# Altium PCB hri_hand_v2_1.PcbDoc
Units mm, origin at the board's own origin, x right, y up, seen from the top; angles counter-clockwise.
Board outline 38.53 x 73.99 mm, 4 copper layers (Top Layer, Mid-Layer 1, Mid-Layer 2, Bottom Layer), stack 0.905 mm thick; 38 components, 26 nets, 122 pads, 152 vias.
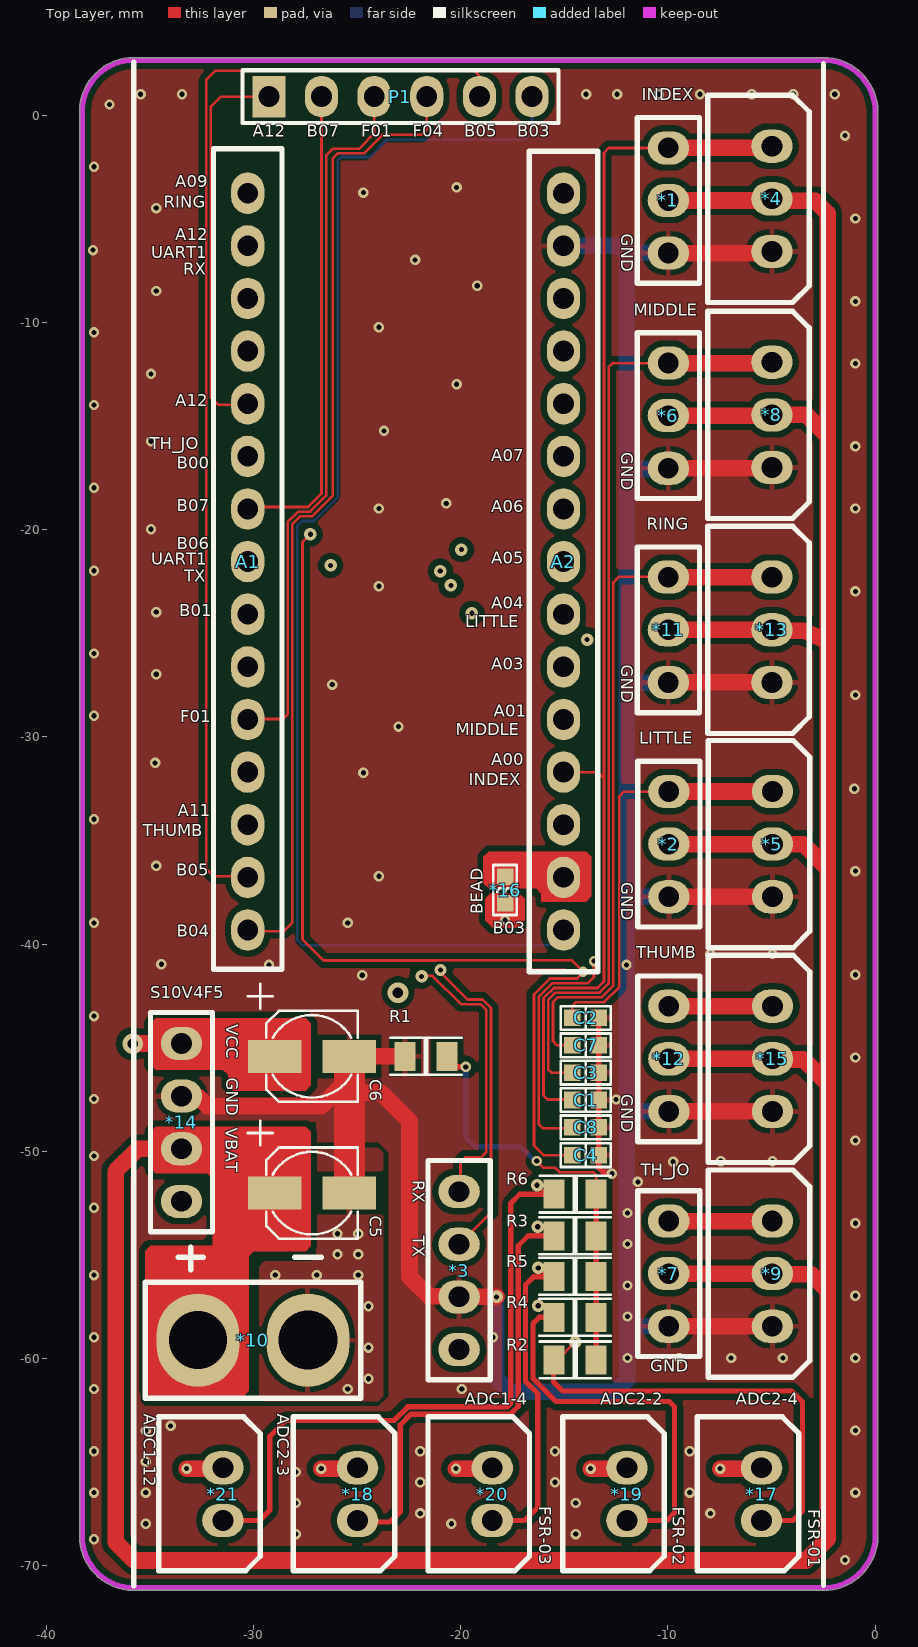
[diagram p0: Top Layer view]
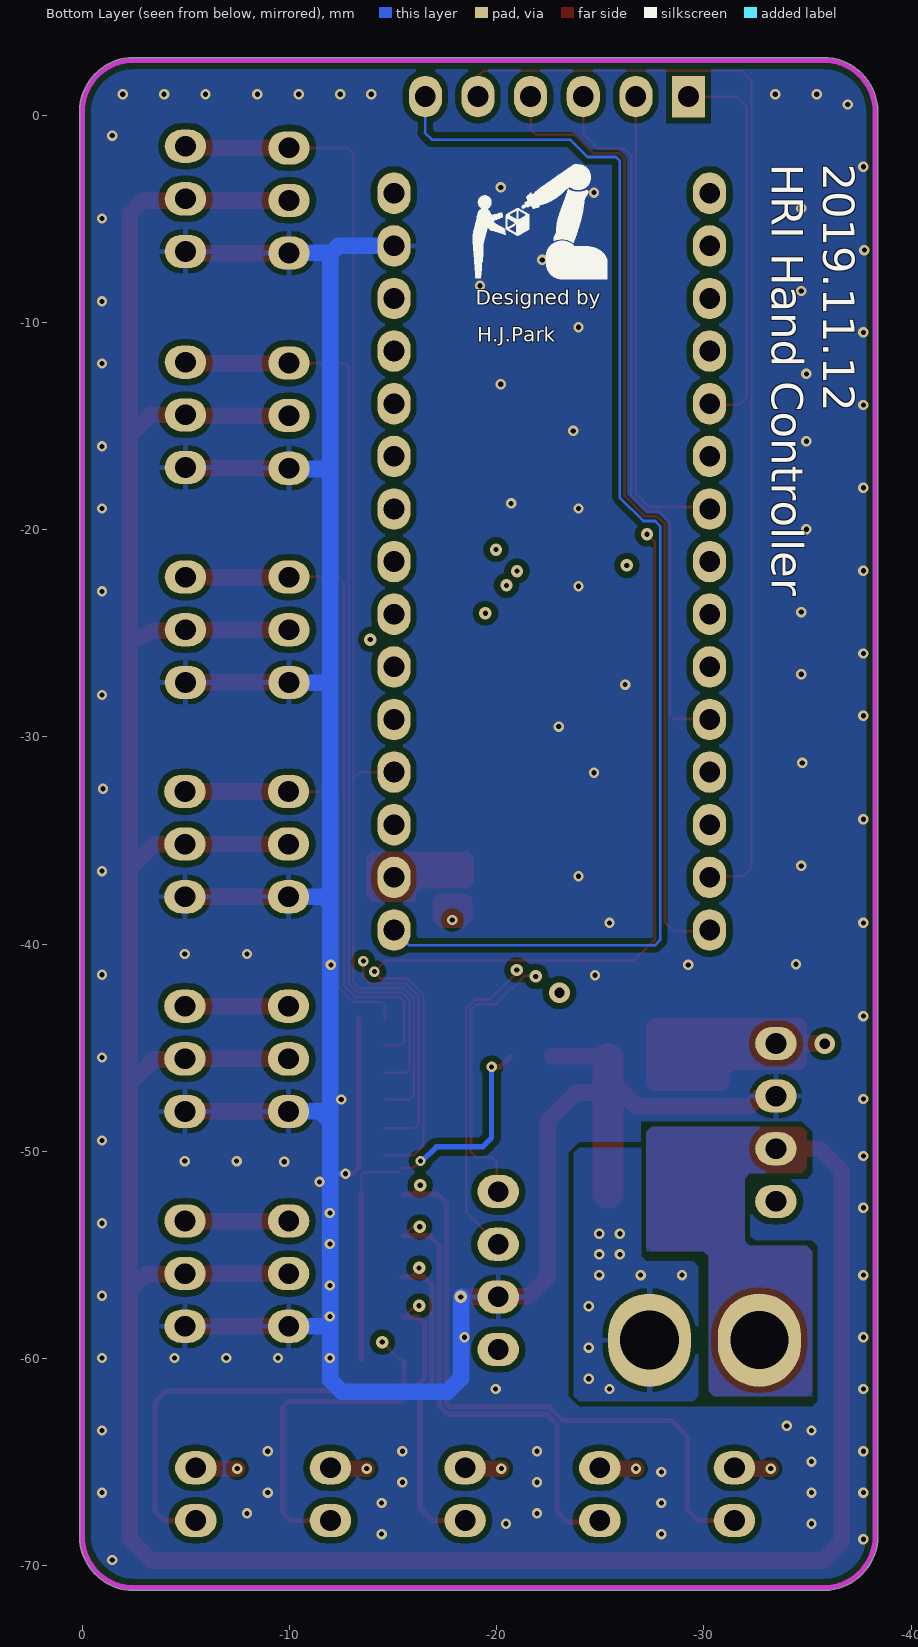
[diagram p1: Bottom Layer view, seen from below]
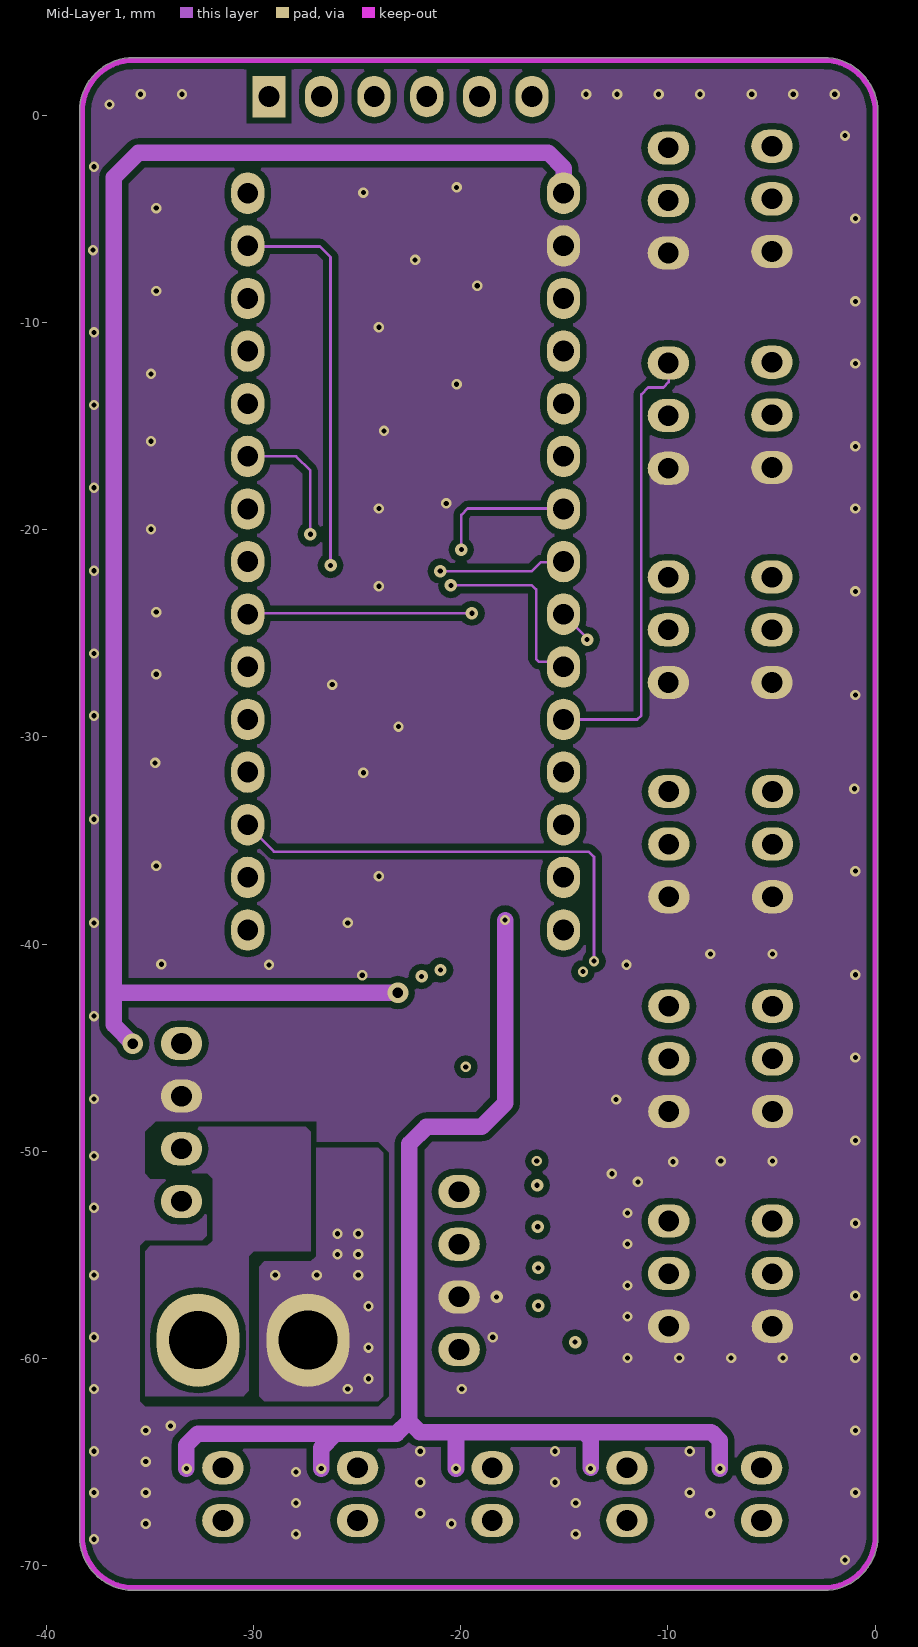
[diagram p2: Mid-Layer 1]
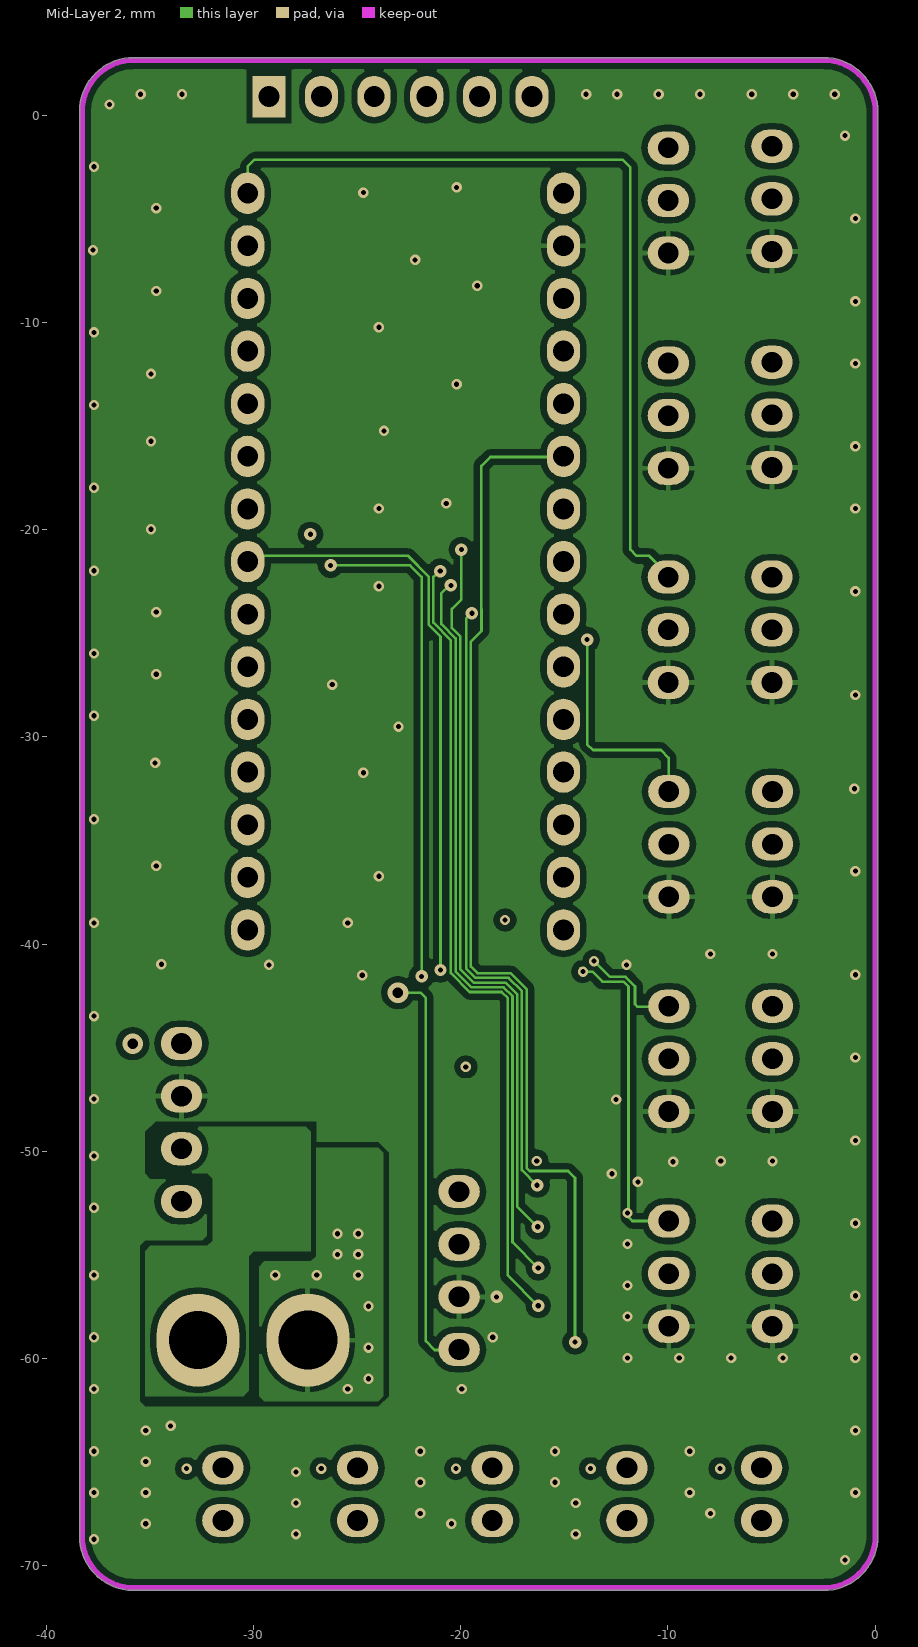
[diagram p3: Mid-Layer 2]
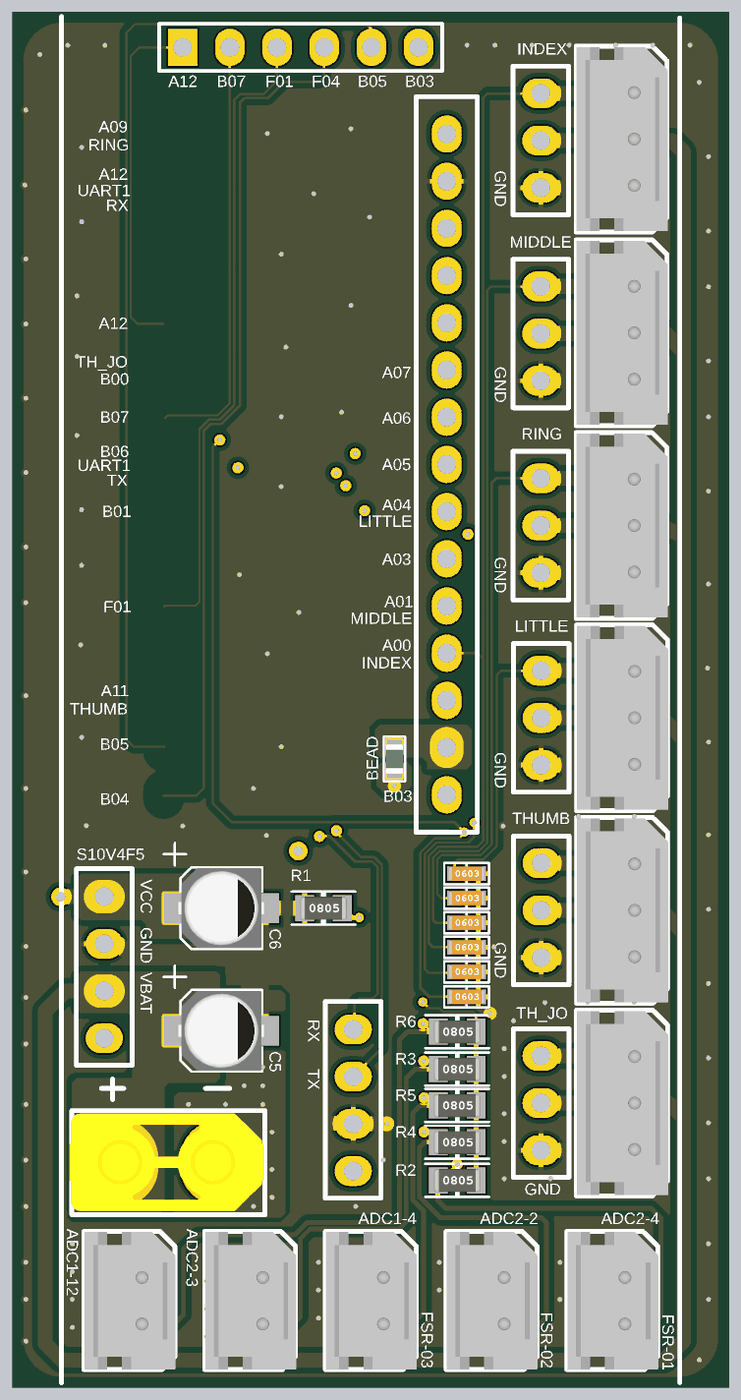
[diagram p4: 3D render of the assembled board from above, using the file's embedded part models]

## Layer stack, top to bottom
Top Solder: solder mask 0.0102, Solder Resist, Dk 3.5
Top Layer: signal copper 0.0356
Dielectric 1: dielectric 0.254, FR-4, Dk 4.8
Mid-Layer 1: signal copper 0.036
Dielectric 3: dielectric 0.254, FR-4, Dk 4.8
Mid-Layer 2: signal copper 0.036
Dielectric 2: dielectric 0.254, FR-4, Dk 4.8
Bottom Layer: signal copper 0.0356
Bottom Solder: solder mask 0.0102, Solder Resist, Dk 3.5

## Board outline
-38.399,-68.569 cw(c-38.271,-68.569) -38.399,-68.562 cw(c-38.271,-68.555) -38.399,-68.555 -38.399,0.178 cw(c-38.271,0.178) -38.399,0.181 cw(c-35.771,0.167) -35.785,2.794 cw(c-35.782,2.667) -35.782,2.794 -2.483,2.794 cw(c-2.483,2.667) -2.48,2.794 cw(c-2.494,0.167) 0.134,0.167 cw(c0.006,0.167) 0.132,0.147 cw(c0.006,0.127) 0.134,0.127 0.134,-68.555 cw(c0.006,-68.555) 0.134,-68.562 cw(c0.006,-68.569) 0.134,-68.569 cw(c-2.494,-68.569) -2.48,-71.197 cw(c-2.483,-71.069) -2.483,-71.197 -35.833,-71.197 cw(c-35.833,-71.069) -35.85,-71.195 cw(c-35.771,-68.569)

## Design rules (kind name [scope] priority, off if disabled: settings)
Clearance Clearance_poly [All vs InPoly] p1: gap=0.3
Clearance [All] p2: gap=0.1
PolygonConnect PolygonConnect_2 [IsPad vs IsNamedPolygon('TOP-GND')Or IsNamedPolygon('BOTTOM-GND')Or IsNamedPolygon('BOTTOM_GND')Or IsNamedPolygon('MID1_GND')Or IsNamedPolygon('MID2_GND')Or IsNamedPolygon('TOP_GND')] p1: connectstyle=Relief reliefconductorwidth=0.254 reliefentries=4 polygonreliefangle="90 Angle" airgapwidth=0.254
PolygonConnect PolygonConnect_1 [IsVia] p2: connectstyle=Direct reliefconductorwidth=0.254 reliefentries=4 polygonreliefangle="90 Angle" airgapwidth=0.254
PolygonConnect [All] p3: connectstyle=Direct reliefconductorwidth=0.254 reliefentries=4 polygonreliefangle="90 Angle" airgapwidth=0.254
RoutingVias [All] p1: holewidth=0 width=0.6 viastyle="Through Hole" minholewidth=0.25 minwidth=0.5 maxholewidth=0.5 maxwidth=1
SolderMaskExpansion [All] p1: expansion=0.102
Width [All] p1: maxlimit=5 minlimit=0.127 preferedwidth=0.254
30 further rules are at their usual default settings.

## Classes and differential pairs
component class hri_hand_v2: *1 *2 *3 *4 *5 *6 *7 *8 *9 *10 *11 *12 *13 *14 *15 *16 A1 A2 C1 C2 C3 C4 C5 C6 C7 C8 P1 R1 R2 R3 R4 R5 R6

## Components (designator, comment, footprint, x,y, rotation, side; value= is the part's Value field where it differs from the comment)
*1 "header_3p_2.54" header_3x1_2.54 -9.978,-4.106 r270 top
*2 "header_3p_2.54" header_3x1_2.54 -9.952,-35.174 r270 top
*3 "hc-06" header_4x1_2.54 -20.078,-51.946 r90 top
*4 "PQ12" molex_3p_2.54 -4.978,-4.026 r270 top
*5 "PQ12" molex_3p_2.54 -4.952,-35.174 r270 top
*6 "header_3p_2.54" header_3x1_2.54 -9.978,-14.492 r270 top
*7 "header_3p_2.54" header_3x1_2.54 -9.96,-55.905 r270 top
*8 "PQ12" molex_3p_2.54 -4.978,-14.452 r270 top
*9 "PQ12" molex_3p_2.54 -4.956,-55.905 r270 top
*10 "XT30U" XT30F -30.028,-59.116 r0 top
*11 "header_3p_2.54" header_3x1_2.54 -9.978,-24.828 r270 top
*12 "header_3p_2.54" header_3x1_2.54 -9.952,-45.535 r270 top
*13 "PQ12" molex_3p_2.54 -4.978,-24.828 r270 top
*14 "S10V4F5" header_4x1_2.54 -33.478,-44.796 r90 top
*15 "PQ12" molex_3p_2.54 -4.952,-45.535 r270 top
*16 "BEAD" L-1608-SS -17.859,-37.389 r270 top
*17 "MOLEX_2pin" molex_2p_2.54 -5.478,-66.546 r270 top
*18 "MOLEX_2pin" molex_2p_2.54 -24.978,-66.546 r270 top
*19 "MOLEX_2pin" molex_2p_2.54 -11.978,-66.546 r270 top
*20 "MOLEX_2pin" molex_2p_2.54 -18.478,-66.546 r270 top
*21 "MOLEX_2pin" molex_2p_2.54 -31.478,-66.546 r270 top
A1 "NUCLEO-F303K8_CN3" header_1*15_3 -1300.281,-1273.756 r0 top
A2 "NUCLEO-F303K8_CN4" header_1*15_4 -15.041,-21.536 r0 top
C1 "1608" CAP-1608-SS -13.973,-47.523 r0 top
C2 "1608" CAP-1608-SS -13.973,-43.561 r0 top
C3 "1608" CAP-1608-SS -13.973,-46.203 r0 top
C4 "1608" CAP-1608-SS -13.973,-50.188 r0 top
C5 "" C-10UF/16V -27.178,-52.016 r90 top
C6 "" C-10UF/16V -27.178,-45.416 r90 top
C7 "1608" CAP-1608-SS -13.973,-44.882 r0 top
C8 "1608" CAP-1608-SS -13.973,-48.844 r0 top
P1 "Header 6" HDR1X6 -29.258,0.909 r0 top
R1 "2012" RES-2012 -21.678,-45.416 r0 top
R2 "2012" RES-2012 -14.478,-60.066 r0 top
R3 "2012" RES-2012 -14.481,-54.077 r0 top
R4 "2012" RES-2012 -14.481,-58.014 r0 top
R5 "2012" RES-2012 -14.481,-56.032 r0 top
R6 "2012" RES-2012 -14.478,-52.066 r0 top

## Footprints (in the part's own frame and the unit in brackets; to place one, negate y for a bottom-side part, rotate by r counter-clockwise, add the part's x,y. Pads: shape width x height; smd on the part's side, far side on the other; paste and mask are expansions set on the pad)
C-10UF/16V [mm]
  rect 1.6x2.6 smd: 1(0,1.8) 2(0,-1.8)
  silkscreen extent -2.2,-2.2 3.5,3.1, body extent -2.15,-2.3 2.15,2.3, height 5.41
CAP-1608-SS [mm]
  rect 0.8x0.8 smd: 1(-0.635,0) 2(0.635,0)
  silkscreen extent -1.21,-0.57 1.21,0.57, body extent -1,-0.39 1,0.39, height 0.79
HDR1X6 [mm] "Connector; Header; 6 Position"
  rect 1.6x2 hole 1: 1(0,0)
  oval 1.6x2 hole 1: 2(2.54,0) 3(5.08,0) 4(7.62,0) 5(10.16,0) 6(12.7,0)
  silkscreen extent -1.27,-1.27 13.97,1.27
header_1*15_3 [mm]
  oval 1.6x2 hole 1: 3.1(1270,1270) 3.2(1270,1267.46) 3.3(1270,1264.92) 3.4(1270,1262.38) 3.5(1270,1259.84) 3.6(1270,1257.3) 3.7(1270,1254.76) 3.8(1270,1252.22) 3.9(1270,1249.68) 3.10(1270,1247.14) 3.11(1270,1244.6) 3.12(1270,1242.06) 3.13(1270,1239.52) 3.14(1270,1236.98) 3.15(1270,1234.44)
  silkscreen extent 1268.35,1232.55 1271.65,1272.15
header_1*15_4 [mm]
  oval 1.6x2 hole 1: 4.1(0,17.78) 4.2(0,15.24) 4.3(0,12.7) 4.4(0,10.16) 4.5(0,7.62) 4.6(0,5.08) 4.7(0,2.54) 4.8(0,0) 4.9(0,-2.54) 4.10(0,-5.08) 4.11(0,-7.62) 4.12(0,-10.16) 4.13(0,-12.7) 4.14(0,-15.24) 4.15(0,-17.78)
  silkscreen extent -1.65,-19.8 1.65,19.8
header_3x1_2.54 [mm]
  oval 1.6x2 hole 1: 1(-2.54,0) 2(0,0) 3(2.54,0)
  silkscreen extent -4,-1.5 4,1.5
header_4x1_2.54 [mm]
  oval 1.6x2 hole 1: 1(-7.62,0) 2(-5.08,0) 3(-2.54,0) 4(0,0)
  silkscreen extent -9.08,-1.5 1.5,1.5
L-1608-SS [mm]
  rect 0.8x0.8 smd: 1(-0.635,0) 2(0.635,0)
  silkscreen extent -1.21,-0.57 1.21,0.57, body extent -0.8,-0.47 0.8,0.48, height 0.83
molex_2p_2.54 [mm] "MOLEX 5267"
  oval 1.6x2 hole 1: 1(-1.27,0) 2(1.27,0)
  silkscreen extent -3.73,-3.1 3.7,1.8, body extent -3.7,-3.07 3.7,1.83, height 5.95
molex_3p_2.54 [mm] "MOLEX 5267"
  oval 1.6x2 hole 1: 1(-2.54,0) 2(0,0) 3(2.54,0)
  silkscreen extent -5,-3.1 5,1.8, body extent -4.95,-3.07 4.95,1.83, height 5.95
RES-2012 [mil]
  rect 40x55 smd: 1(-40,0) 2(40,0)
  silkscreen extent -68,-35 68,35, body extent -49,-25 49,24, height 31
XT30F [mm]
  oval 4x4.5 hole 2.8: 1(-2.65,0)
  oval 4x4.5 hole 2.85: 2(2.65,0)
  silkscreen extent -5.2,-2.8 5.2,4.5, body extent -5.33,-2.6 5.12,2.65, height 12.6

## Part data
A1 A2: "STM32 Nucleo-32 development board with STM32F303K8T6 MCU, supports Arduino connectivity"
C1 C2 C3 C4 C7 C8: library part "CAP NP"
C5 C6: library part Cap2, "Capacitor"
P1: "Header, 6-Pin"
R1 R2 R3 R4 R5 R6: library part Res3, "Resistor"

## Via types
v1: diameter 0.5, hole 0.25, Top Layer to Bottom Layer, tented both sides, 124 vias
v2: diameter 0.6, hole 0.25, Top Layer to Bottom Layer, 15 vias
v3: diameter 0.5, hole 0.25, Top Layer to Bottom Layer, 11 vias
v4: diameter 1, hole 0.5, Top Layer to Bottom Layer, 2 vias

## Nets (pads, with @x,y where several pads share a name; then routed paths per layer and width w, separated by ;. In a path a pad name is that pad's centre, name@x,y a point inside that pad or via, vN(x,y) a via of type N, cw(c..) or ccw(c..) an arc to the next point about the centre after c; other vN are vias at no path point)
3.3V: *16.1 A2.4.14
A3.3V: *16.2 *17.1 *18.1 *19.1 *20.1 *21.1 | length 71.5
  Top Layer w0.8: v3(-33.228,-65.316) -31.518,-65.316 *21.1 ; v3(-26.728,-65.316) -25.018,-65.316 *18.1 ; v3(-20.228,-65.316) -18.518,-65.316 *20.1 ; v3(-13.728,-65.316) -12.018,-65.316 *19.1 ; v3(-7.478,-65.316) -5.518,-65.316 *17.1
  Mid-Layer 1 w0.8: v3@-33.252,-65.329 -33.252,-64.186 -32.693,-63.627 -23.092,-63.627 -22.495,-63.03 ; v3(-26.728,-65.316) -26.728,-64.317 -26.064,-63.652 ; -22.508,-63.017 -22.495,-63.03 ; -22.478,-62.996 -22.478,-49.637 -21.66,-48.819 -18.993,-48.819 -17.859,-47.685 v3(-17.859,-38.837) ; v3(-20.228,-65.316) -20.228,-63.824 -20.501,-63.551 ; v3@-13.719,-65.278 -13.719,-63.881 -14.049,-63.551 ; v3@-7.496,-65.329 -7.496,-63.957 -7.903,-63.551 -14.049,-63.551 ; -22.495,-63.03 -21.974,-63.551 -20.501,-63.551 ; -20.501,-63.551 -14.049,-63.551
AGND: R1.2 R2.2 R3.2 R4.2 R5.2 R6.2 | length 20.5
  Top Layer w0.127: v3(-16.326,-50.47) -15.996,-50.8 -15.437,-50.8 -15.234,-51.003 -13.608,-51.003 -13.462,-51.149 R6.2
  Top Layer w0.254: R1.2 -20.154,-45.923 v3(-19.755,-45.923) ; R2.2 -13.462,-54.077 R6.2
  Bottom Layer w0.254: v3(-19.755,-45.923) -19.755,-49.352 -19.323,-49.784 -17.088,-49.784 -16.402,-50.47 v3(-16.326,-50.47)
"FSR_01, ADC2_4": *17.2 A2.4.6 R2.1 | length 73.1
  Top Layer w0.127: R2.1 -15.339,-60.066 v2(-14.481,-59.207)
  Top Layer w0.254: R2.1@-15.446,-60.071 -15.523,-60.147 -15.523,-61.138 -15.091,-61.57 -4.042,-61.57 -3.508,-62.103 -3.508,-67.361 -3.963,-67.816 *17.2
  Mid-Layer 2 w0.127: A2.4.6@-15.015,-16.434 -15.065,-16.485 -18.571,-16.485 -19.002,-16.916 -19.002,-23.83 -18.996,-23.836 -18.996,-24.886 -19.512,-25.402 -19.512,-41.079 -19.188,-41.404 -17.588,-41.404 -16.82,-42.172 -16.82,-50.808 -16.675,-50.952 -14.811,-50.952 -14.481,-51.283 v2(-14.481,-59.207)
"FSR_02, ADC2_2": *19.2 A2.4.8 R4.1 | length 64.5
  Top Layer w0.127: v2(-16.259,-57.455) -16.056,-57.455 R4.1
  Top Layer w0.254: R4.1 -16.208,-58.014 -16.513,-58.318 -16.513,-60.96 -15.396,-62.078 -9.935,-62.078 -9.681,-62.332 -9.681,-67.462 -10.034,-67.816 *19.2
  Mid-Layer 1 w0.127: v2(-20.984,-21.996) -16.564,-21.996 -16.132,-21.565 A2.4.8@-15.065,-21.565
  Mid-Layer 2 w0.127: v2(-20.984,-21.996) -21.034,-21.996 -21.32,-22.282 -21.32,-24.486 -20.472,-25.334 -20.472,-41.403 -19.564,-42.312 -18.02,-42.312 -17.728,-42.604 -17.728,-55.986 v2(-16.259,-57.455)
"FSR_03, ADC1_4": *20.2 A2.4.10 R5.1 | length 61
  Top Layer w0.127: v2(-16.259,-55.626) -15.853,-56.032 R5.1
  Top Layer w0.254: *20.2 -16.917,-67.816 -16.285,-67.183 -16.285,-61.689 -16.867,-61.107 -16.867,-57.609 -16.869,-57.607 -16.869,-56.439 -16.488,-56.058 R5.1@-15.446,-56.058
  Mid-Layer 1 w0.127: v2@-20.459,-22.699 v2(-20.476,-22.682) -16.564,-22.682 -16.361,-22.885 -16.361,-26.238 -16.234,-26.365 -15.294,-26.365 A2.4.10@-15.065,-26.594
  Mid-Layer 2 w0.127: v2(-20.476,-22.682) -20.552,-22.682 -20.933,-23.063 -20.933,-24.553 -20.245,-25.24 -20.245,-41.309 -19.47,-42.085 -17.926,-42.085 -17.501,-42.51 -17.501,-54.385 v2(-16.259,-55.626)
"FSR_04, ADC2_3": *18.2 A2.4.7 R3.1 | length 65.4
  Top Layer w0.127: v2(-16.285,-53.645) -15.929,-53.645 R3.1
  Top Layer w0.254: *18.2 -24.899,-67.894 -23.422,-67.894 -22.914,-67.386 -22.914,-63.195 -22.406,-62.687 -17.605,-62.687 -17.224,-62.306 -17.224,-61.253 -17.223,-61.252 -17.223,-54.558 -16.742,-54.077 R3.1
  Mid-Layer 1 w0.127: v2(-19.968,-20.955) -19.968,-19.279 -19.663,-18.974 -15.116,-18.974 A2.4.7@-15.091,-18.999
  Mid-Layer 2 w0.127: v2@-19.968,-20.93 v2(-19.968,-20.955) -19.968,-23.368 -20.425,-23.825 -20.425,-24.74 -20.018,-25.146 -20.018,-41.215 -19.376,-41.858 -17.832,-41.858 -17.274,-42.416 -17.274,-52.656 v2(-16.285,-53.645) ; A2.4.7@-15.04,-19.05 A2.4.7@-15.015,-19.025
"FSR_05, ADC1_12": *21.2 A1.3.9 R6.1 | length 72.2
  Top Layer w0.127: v2(-16.31,-51.638) -15.883,-52.066 R6.1
  Top Layer w0.254: *21.2 -29.719,-67.816 -29.213,-67.31 -29.213,-63.754 -28.451,-62.992 -23.211,-62.992 -22.553,-62.333 -17.752,-62.333 -17.578,-62.16 -17.578,-52.5 -17.148,-52.07 -15.523,-52.07 R6.1@-15.497,-52.095
  Mid-Layer 1 w0.127: A1.3.9@-30.28,-24.054 -30.255,-24.028 v2(-19.46,-24.028)
  Mid-Layer 2 w0.127: v2(-19.46,-24.028) -19.485,-24.028 -19.739,-24.282 -19.739,-41.173 -19.282,-41.631 -17.682,-41.631 -17.047,-42.266 -17.047,-50.902 v2(-16.31,-51.638)
GND: *1.3 *2.3 *3.2 *4.3 *5.3 *6.3 *7.3 *8.3 *9.3 *10.2 *11.3 *12.3 *13.3 *14.3 *15.3 A2.4.2 C1.2 C2.2 C3.2 C4.2 C5.2 C6.2 C7.2 C8.2 R1.1 | length 153.6
  Top Layer w0.254: *14.3 *14.3@-32.708,-47.336 ; C6.2@-25.478,-45.566 C6.2@-25.328,-45.416 ; C2.2@-13.287,-43.561 -13.338,-43.612 C7.2 C3.2 C1.2 C8.2 C4.2 -13.338,-50.8 -13.084,-51.054 v3@-12.703,-51.054 ; *9.3@-5.108,-58.445 *9.3@-4.978,-58.316
  Top Layer w0.8: *14.3@-32.708,-47.336 -32.228,-47.816 -26.728,-47.816 -25.978,-47.066 ; -25.378,-47.168 -23.844,-47.168 -22.473,-48.539 -22.473,-56.058 -21.533,-56.998 *3.2@-20.085,-56.998 ; C6.2@-25.328,-45.416 R1.1 ; *3.2 v2(-18.268,-57.026) ; *11.3 -5.03,-27.368 *13.3@-4.978,-27.316 ; *6.3 -5.011,-17.032 *8.3@-4.978,-17.066 ; *1.3 -5.058,-6.646 *4.3 ; *7.3 *9.3@-5.108,-58.445 ; *12.3 -4.987,-48.075 *15.3@-4.978,-48.066 ; *2.3 -5.126,-37.714 *5.3@-4.978,-37.566
  Top Layer w1.5: C5.2 -25.378,-47.168 C6.2@-25.378,-45.516
  Bottom Layer w0.254: v3(-12.703,-51.079) -11.978,-51.079
  Bottom Layer w0.8: -18.291,-60.122 -18.282,-60.131 ; v2@-18.282,-57.026 -18.282,-60.131 ; A2.4.2 -12.351,-6.296 -11.904,-6.742 -11.978,-6.816 -11.978,-17.316 ; A2.4.2@-15.015,-6.299 A2.4.2@-14.659,-6.655 ; -11.84,-6.756 -11.879,-6.717 -11.792,-6.629 -10.042,-6.629 *1.3@-9.978,-6.566 ; *7.3@-9.978,-58.566 -10.098,-58.445 -11.967,-58.445 ; *12.3@-9.978,-48.066 -11.478,-48.066 -11.978,-48.566 ; *2.3@-9.978,-37.816 -10.074,-37.719 -11.631,-37.719 -11.978,-38.066 ; *6.3@-9.978,-17.066 -11.728,-17.066 -11.978,-17.316 ; *11.3@-9.728,-27.316 -9.793,-27.381 -11.793,-27.381 -11.978,-27.566 ; -18.282,-60.131 -18.282,-60.944 -17.631,-61.595 -12.525,-61.595 -11.967,-61.036 -11.967,-58.445 ; -11.978,-48.566 -11.978,-51.079 -11.978,-56.475 -11.978,-58.066 -11.967,-58.077 -11.967,-58.445 ; -11.978,-48.566 -11.978,-38.066 ; -11.978,-38.066 -11.978,-27.566 ; -11.978,-27.566 -11.978,-17.316
  other v1: -1.449,-69.725 -37.699,-68.725 -27.949,-68.475 -14.449,-68.475 -35.199,-67.975 -20.449,-67.975 -21.949,-67.475 -7.949,-67.475 -27.949,-66.975 -14.449,-66.975 -37.699,-66.475 -35.199,-66.475 -8.949,-66.475 -0.949,-66.475 -21.949,-65.975 -15.449,-65.975 -27.949,-65.475 -35.199,-64.975 -37.699,-64.475 -21.949,-64.475 -15.449,-64.475 -8.949,-64.475 -35.199,-63.475 -0.949,-63.475 -34,-63.25 -37.699,-61.475 -25.449,-61.475 -19.949,-61.475 -24.449,-60.975 -11.949,-59.975 -9.449,-59.975 -6.949,-59.975 -4.449,-59.975 -0.949,-59.975 -24.449,-59.475 -37.699,-58.975 -18.449,-58.975 -11.949,-57.975 -24.449,-57.475 -0.949,-56.975 -11.949,-56.475 -37.699,-55.975 -28.949,-55.975 -26.949,-55.975 -24.949,-55.975 -25.949,-54.975 -24.949,-54.975 -11.949,-54.475 -25.949,-53.975 -24.949,-53.975 -0.949,-53.475 -11.949,-52.975 -37.699,-52.725 -11.449,-51.475 -9.75,-50.5 -7.449,-50.475 -4.949,-50.475 -37.699,-50.225 -0.949,-49.475 -12.5,-47.5 -37.699,-47.475 -0.949,-45.475 -37.699,-43.475 -24.75,-41.5 -0.949,-41.475 -29.25,-41 -12,-41 -34.449,-40.975 -7.949,-40.475 -4.949,-40.475 -37.699,-38.975 -25.449,-38.975 -23.949,-36.725 -0.949,-36.475 -34.699,-36.225 -37.699,-33.975 -1,-32.5 -24.699,-31.725 -34.75,-31.25 -23,-29.5 -37.699,-28.975 -0.949,-27.975 -26.199,-27.475 -34.699,-26.975 -37.699,-25.975 -34.699,-23.975 -0.949,-22.975 -23.949,-22.725 -37.699,-21.975 -34.949,-19.975 -23.949,-18.975 -0.949,-18.975 -20.699,-18.725 -37.699,-17.975 -0.949,-15.975 -34.949,-15.725 -23.699,-15.225 -37.699,-13.975 -20.199,-12.975 -34.949,-12.475 -0.949,-11.975 -37.699,-10.475 -23.949,-10.225 -0.949,-8.975 -34.699,-8.475 -19.199,-8.225 -22.199,-6.975 -37.75,-6.5 -0.949,-4.975 -34.699,-4.475 -24.699,-3.725 -20.199,-3.475 -37.699,-2.475 -1.449,-0.975 -36.949,0.525 -35.449,1.025 -33.449,1.025 -13.949,1.025 -12.449,1.025 -10.449,1.025 -8.449,1.025 -5.949,1.025 -3.949,1.025 -1.949,1.025
GPIO_A12: A1.3.5 P1.1 | length 18.9
  Top Layer w0.127: A1.3.5@-30.305,-13.97 -31.702,-13.97 -32.058,-13.614 -32.058,0.432 -31.58,0.909 P1.1
GPIO_B3: A2.4.15 P1.6 | length 63.7
  Bottom Layer w0.127: P1.6 -16.558,-0.819 -16.539,-0.838 -16.869,-1.168 -23.549,-1.168 -24.387,-2.007 -25.759,-2.007 -25.937,-2.184 -25.937,-18.438 -27.077,-19.579 -27.652,-19.579 -27.896,-19.822 -27.896,-39.799 -27.638,-40.056 -15.777,-40.056 A2.4.15@-15.065,-39.345
GPIO_B4: A1.3.15 P1.4 | length 47.1
  Top Layer w0.127: A1.3.15@-30.28,-39.37 -28.527,-39.37 -28.123,-38.965 -28.123,-19.728 -27.746,-19.352 -27.171,-19.352 -26.17,-18.35 -26.17,-2.062 -25.937,-1.829 -24.667,-1.829 -23.778,-0.94 -21.898,-0.94 -21.638,-0.68 P1.4
GPIO_B5: A1.3.14 P1.5 | length 54.7
  Top Layer w0.127: A1.3.14@-30.255,-36.728 -31.906,-36.728 -32.287,-36.347 -32.287,1.702 -31.829,2.159 -19.358,2.159 -19.098,1.899 P1.5
GPIO_B7: A1.3.7 P1.2 | length 23
  Top Layer w0.127: A1.3.7@-30.204,-19.025 -30.077,-18.898 -27.359,-18.898 -26.718,-18.256 P1.2
GPIO_F1: A1.3.11 P1.3 | length 34.6
  Top Layer w0.127: A1.3.11@-30.255,-29.185 -30.204,-29.134 -28.578,-29.134 -28.35,-28.905 -28.35,-19.634 -27.84,-19.125 -27.265,-19.125 -26.491,-18.35 -26.491,-1.926 -26.165,-1.6 -24.895,-1.6 -24.178,-0.883 P1.3
PWM_INDEX: *1.1 *4.1 A2.4.12 C1.1 | length 59.7
  Top Layer w0.127: A2.4.12 -13.393,-31.696 -13.084,-32.004 ; C1.1@-14.659,-47.498 -15.802,-47.498 -16.002,-47.298 -16.002,-42.611 -15.507,-42.116 -15.504,-42.116 -15.506,-42.115 -13.391,-42.115 -13.084,-41.808 -13.084,-32.004 ; *1.1@-9.96,-1.575 -12.856,-1.575 -13.084,-1.803 -13.084,-32.004
  Top Layer w0.8: *1.1 -4.947,-1.566 *4.1@-4.931,-1.549
PWM_LITTLE: *2.1 *5.1 A2.4.9 C2.1 | length 33.2
  Top Layer w0.127: C2.1 -14.608,-42.977 -14.43,-42.799 -13.084,-42.799 -12.348,-42.062 -12.348,-32.868 -12.119,-32.639 *2.1@-9.96,-32.639
  Top Layer w0.8: *2.1 *5.1 -4.936,-32.634 *5.1@-4.931,-32.639
  Mid-Layer 1 w0.127: A2.4.9 -13.897,-25.22 v2(-13.897,-25.298) ; *2.1@-10.341,-32.258 *2.1@-9.909,-32.69
  Mid-Layer 2 w0.127: v2(-13.897,-25.298) -13.897,-30.353 -13.618,-30.632 -10.341,-30.632 -9.96,-31.013 *2.1@-9.96,-32.69
PWM_MIDDLE: *6.1 *8.1 A2.4.11 C3.1 | length 67.3
  Top Layer w0.127: C3.1 -15.624,-46.203 -15.775,-46.052 -15.775,-42.705 -15.413,-42.343 -13.298,-42.343 -12.857,-41.902 -12.857,-12.143 -12.678,-11.963 *6.1@-9.96,-11.963
  Top Layer w0.8: *6.1 -4.97,-11.952 *8.1@-4.956,-11.938
  Mid-Layer 1 w0.127: A2.4.11 -11.48,-29.156 -11.281,-28.956 -11.281,-13.462 -10.951,-13.132 -10.214,-13.132 -9.96,-12.878 *6.1@-9.96,-12.04
PWM_RING: *11.1 *13.1 A1.3.1 C7.1 | length 74.2
  Top Layer w0.127: C7.1 -15.345,-44.882 -15.548,-44.679 -15.548,-42.799 -15.319,-42.57 -13.204,-42.57 -12.63,-41.996 -12.63,-22.533 -12.373,-22.276 *11.1@-9.96,-22.276
  Top Layer w0.8: *11.1 *13.1 -4.97,-22.288 *13.1@-4.956,-22.301
  Mid-Layer 2 w0.127: A1.3.1 -30.281,-2.465 -29.95,-2.134 -12.195,-2.134 -11.814,-2.515 -11.814,-20.955 -11.509,-21.26 -10.9,-21.26 *11.1@-10.011,-22.149
PWM_TH_JO: *7.1 *9.1 A1.3.6 C4.1 | length 73.3
  Top Layer w0.127: v2(-27.257,-20.218) -27.638,-20.599 -27.638,-39.776 -26.622,-40.792 -21.172,-40.792 -21.166,-40.786 -14.64,-40.786 v3(-14.1,-41.326) -14.1,-41.377 -14.384,-41.661 -15.694,-41.661 -16.456,-42.423 ; -16.462,-45.07 -16.462,-49.708 -15.98,-50.19 ; -16.462,-45.064 -16.462,-42.423 ; -15.98,-50.188 -15.274,-50.188 ; -15.274,-50.19 -15.271,-50.188 C4.1
  Top Layer w0.8: *7.1 *9.1
  Mid-Layer 1 w0.127: A1.3.6@-30.255,-16.459 -27.943,-16.459 -27.257,-17.145 v2(-27.257,-20.218)
  Mid-Layer 2 w0.127: v3@-14.227,-41.173 -14.075,-41.326 -13.643,-41.326 -13.16,-41.808 -12.135,-41.808 -11.899,-42.045 -11.899,-53.179 -11.713,-53.365 -9.985,-53.365 *7.1@-9.935,-53.416
PWM_THUMB: *12.1 *15.1 A1.3.13 C8.1 | length 44.2
  Top Layer w0.127: C8.1@-14.608,-48.895 -16.031,-48.895 -16.229,-48.697 -16.229,-42.517 -15.6,-41.888 -13.875,-41.888 -13.567,-41.58 v3(-13.567,-40.818)
  Top Layer w0.8: *12.1 *15.1 -4.913,-42.995 *15.1@-4.88,-43.028
  Mid-Layer 1 w0.127: A1.3.13@-30.229,-34.29 -30.229,-34.315 -29.01,-35.535 -13.821,-35.535 -13.567,-35.789 v3(-13.567,-40.818)
  Mid-Layer 2 w0.127: v3(-13.567,-40.818) -12.803,-41.581 -12.041,-41.581 -11.586,-42.037 -11.586,-42.901 -11.459,-43.028 *12.1@-9.935,-43.028
PWM_THUMB_JOINT: 
UART1_RX: *3.4 A1.3.2 | length 56.4
  Top Layer w0.127: v2(-21.888,-41.554) -21.863,-41.529 -21.35,-41.529 -19.978,-42.901 -19.044,-42.901 -18.764,-43.18 -18.764,-50.038 -19.018,-50.292 -19.78,-50.292 -20.009,-50.521 -20.009,-51.892 *3.4@-20.034,-51.918
  Mid-Layer 1 w0.127: A1.3.2@-30.194,-6.325 -26.791,-6.325 -26.283,-6.833 v2(-26.283,-21.717)
  Mid-Layer 2 w0.127: v2(-26.283,-21.717) -26.281,-21.715 -22.449,-21.715 -21.888,-22.276 v2(-21.888,-41.554)
UART1_TX: *3.3 A1.3.8 | length 43.8
  Top Layer w0.127: v2(-20.974,-41.25) -20.974,-41.36 -19.661,-42.674 -18.95,-42.674 -18.536,-43.088 -18.536,-52.943 *3.3
  Mid-Layer 2 w0.127: A1.3.8@-30.321,-21.539 -30.036,-21.254 -22.555,-21.254 -21.547,-22.261 -21.547,-24.58 -20.974,-25.153 v2(-20.974,-41.25)
V_BAT: *1.2 *2.2 *4.2 *5.2 *6.2 *7.2 *8.2 *9.2 *10.1 *11.2 *12.2 *13.2 *14.2 *15.2 C5.1 | length 169.2
  Top Layer w0.254: *9.2@-5.032,-55.931 -5.007,-55.905 -4.982,-55.931 *9.2@-4.956,-55.956
  Top Layer w0.8: *14.2 -35.579,-49.876 -36.655,-50.952 -36.655,-68.859 -35.766,-69.748 -3.331,-69.748 -2.289,-68.707 -2.289,-56.718 ; *11.2 *13.2 -4.943,-24.828 -4.904,-24.867 -3.458,-24.867 -2.289,-25.4 ; *6.2 -4.97,-14.492 *8.2@-4.931,-14.453 ; *1.2 -5.074,-4.106 -5.065,-4.115 -2.899,-4.115 -2.289,-4.724 -2.289,-15.469 ; *7.2 *9.2@-5.007,-55.905 ; *12.2 -4.963,-45.535 *15.2@-4.931,-45.568 ; *2.2 *5.2@-4.961,-35.174 ; *9.2@-5.032,-55.931 -4.982,-55.931 -3.077,-55.931 -2.289,-56.718 ; *13.2@-4.982,-24.816 *13.2@-4.931,-24.816 ; *15.2@-4.956,-45.568 *15.2@-4.931,-45.568 ; *8.2@-4.905,-14.453 -3.305,-14.453 -2.289,-15.469 ; *5.2@-4.829,-35.306 -4.956,-35.179 -3.458,-35.179 -2.289,-36.347 ; *15.2@-4.931,-45.568 -3.458,-45.568 -2.289,-46.736 ; -2.289,-56.718 -2.289,-46.736 ; -2.289,-46.736 -2.289,-36.347 ; -2.289,-36.347 -2.289,-25.4 ; -2.289,-25.4 -2.289,-15.469
VCC: *3.1 *14.4 A2.4.1 C6.1 | length 101.9
  Top Layer w0.254: v4(-35.833,-44.806) v4@-35.823,-44.796
  Top Layer w0.8: v4@-35.823,-44.796 *14.4
  Mid-Layer 1 w0.8: v4(-35.833,-44.806) -36.747,-43.891 -36.747,-42.342 ; v4(-23.031,-42.342) -23.031,-42.393 -23.082,-42.342 -36.747,-42.342 ; A2.4.1@-15.03,-3.81 -15.03,-2.54 -15.767,-1.803 -35.554,-1.803 -36.747,-2.997 -36.747,-42.342
  Mid-Layer 2 w0.127: v4(-23.031,-42.342) -21.939,-42.342 -21.685,-42.596 -21.685,-59.157 -21.253,-59.588 *3.1@-20.085,-59.588
pads on no net: *14.1 A1.3.3 A1.3.4 A1.3.10 A1.3.12 A2.4.3 A2.4.4 A2.4.5 A2.4.13

## Polygon pours and split planes (outlines as drawn)
GND on Top Layer "TOP-GND" (solid, remove dead copper, pour order 12): -29.728,-61.816 -29.728,-61.566 -29.728,-55.566 -29.478,-55.316 -27.228,-55.316 -26.978,-55.066 -26.978,-50.066 -26.728,-49.816 -23.978,-49.816 -23.728,-50.066 -23.728,-61.816 -23.978,-62.066 -29.478,-62.066
GND on Top Layer "TOP_GND" (solid, remove dead copper, pour order 17): -37.893,-68.871 cw(c-37.771,-68.833) -37.899,-68.833 -37.899,0.167 cw(c-37.771,0.167) -37.897,0.19 cw(c-35.751,0.14) -35.819,2.285 cw(c-35.771,2.167) -35.771,2.294 -2.271,2.294 cw(c-2.271,2.167) -2.199,2.271 cw(c-2.502,0.165) -0.374,0.165 cw(c-2.502,0.165) -0.378,0.036 cw(c-0.5,0) -0.373,0 -0.373,-68.5 cw(c-0.5,-68.5) -0.386,-68.558 cw(c-2.667,-68.377) -2.748,-70.663 cw(c-2.743,-70.536) -2.794,-70.653 -35.694,-70.653 cw(c-35.737,-70.533) -35.734,-70.66 cw(c-35.789,-68.529)
GND on Bottom Layer "BOTTOM-GND" (solid, remove dead copper, pour order 14): -29.728,-61.816 -29.728,-61.566 -29.728,-55.566 -29.478,-55.316 -27.228,-55.316 -26.978,-55.066 -26.978,-50.066 -26.728,-49.816 -23.978,-49.816 -23.728,-50.066 -23.728,-61.816 -23.978,-62.066 -29.478,-62.066
GND on Bottom Layer "BOTTOM_GND" (solid, pour order 13): -37.893,-68.871 cw(c-37.771,-68.833) -37.899,-68.833 -37.899,0.167 cw(c-37.771,0.167) -37.897,0.19 cw(c-35.751,0.14) -35.819,2.285 cw(c-35.771,2.167) -35.771,2.294 -2.271,2.294 cw(c-2.271,2.167) -2.199,2.271 cw(c-2.502,0.165) -0.374,0.165 cw(c-2.502,0.165) -0.378,0.036 cw(c-0.5,0) -0.373,0 -0.373,-68.5 cw(c-0.5,-68.5) -0.386,-68.558 cw(c-2.667,-68.377) -2.748,-70.663 cw(c-2.743,-70.536) -2.794,-70.653 -35.694,-70.653 cw(c-35.737,-70.533) -35.734,-70.66 cw(c-35.789,-68.529)
GND on Mid-Layer 1 "Mechanical 2-No Net" (solid, pour order 18): -37.893,-68.871 cw(c-37.771,-68.833) -37.899,-68.833 -37.899,0.167 cw(c-37.771,0.167) -37.897,0.19 cw(c-35.751,0.14) -35.819,2.285 cw(c-35.771,2.167) -35.771,2.294 -2.271,2.294 cw(c-2.271,2.167) -2.199,2.271 cw(c-2.502,0.165) -0.374,0.165 cw(c-2.502,0.165) -0.378,0.036 cw(c-0.5,0) -0.373,0 -0.373,-68.5 cw(c-0.5,-68.5) -0.386,-68.558 cw(c-2.667,-68.377) -2.748,-70.663 cw(c-2.743,-70.536) -2.794,-70.653 -35.694,-70.653 cw(c-35.737,-70.533) -35.734,-70.66 cw(c-35.789,-68.529)
GND on Mid-Layer 1 "MID1_GND" (solid, pour order 16): -37.893,-68.871 cw(c-37.771,-68.833) -37.899,-68.833 -37.899,0.167 cw(c-37.771,0.167) -37.897,0.19 cw(c-35.751,0.14) -35.819,2.285 cw(c-35.771,2.167) -35.771,2.294 -2.271,2.294 cw(c-2.271,2.167) -2.199,2.271 cw(c-2.502,0.165) -0.374,0.165 cw(c-2.502,0.165) -0.378,0.036 cw(c-0.5,0) -0.373,0 -0.373,-68.5 cw(c-0.5,-68.5) -0.386,-68.558 cw(c-2.667,-68.377) -2.748,-70.663 cw(c-2.743,-70.536) -2.794,-70.653 -35.694,-70.653 cw(c-35.737,-70.533) -35.734,-70.66 cw(c-35.789,-68.529)
GND on Mid-Layer 2 "MID2_GND" (solid, pour order 15): -37.893,-68.871 cw(c-37.771,-68.833) -37.899,-68.833 -37.899,0.167 cw(c-37.771,0.167) -37.897,0.19 cw(c-35.751,0.14) -35.819,2.285 cw(c-35.771,2.167) -35.771,2.294 -2.271,2.294 cw(c-2.271,2.167) -2.199,2.271 cw(c-2.502,0.165) -0.374,0.165 cw(c-2.502,0.165) -0.378,0.036 cw(c-0.5,0) -0.373,0 -0.373,-68.5 cw(c-0.5,-68.5) -0.386,-68.558 cw(c-2.667,-68.377) -2.748,-70.663 cw(c-2.743,-70.536) -2.794,-70.653 -35.694,-70.653 cw(c-35.737,-70.533) -35.734,-70.66 cw(c-35.789,-68.529)

## Keep-outs
Keep-Out Layer:
  lines w0.254: -38.271,-68.569 ccw(c-35.771,-68.569) -35.771,-71.069 ; -38.271,-68.555 -38.271,0.178 ; -38.271,0.167 cw(c-35.771,0.167) -35.771,2.667 ; -35.833,-71.069 -2.483,-71.069 ; -35.782,2.667 -2.483,2.667 ; -2.494,-71.069 ccw(c-2.494,-68.569) 0.006,-68.569 ; -2.494,2.667 cw(c-2.494,0.167) 0.006,0.167 ; 0.006,-68.555 0.006,0.127

## Other copper
Top Layer:
  region net A3.3V: -16.92,-38.837 -16.92,-37.821 -17.174,-37.567 -18.571,-37.567
  region net A3.3V: -18.571,-37.567 -18.825,-37.821 -18.825,-38.837 -18.444,-39.218 -17.301,-39.218 -16.92,-38.837
  region net 3.3V: -16.361,-37.313 -16.107,-37.567 -16.107,-37.948 -13.948,-37.948 -13.694,-37.694 -13.694,-35.763 -13.719,-35.763 -13.948,-35.535 -18.647,-35.535 -18.901,-35.789 -18.901,-37.059 -18.647,-37.313
  region net VCC: -27.478,-43.566 -34.728,-43.566 -34.978,-43.816 -34.978,-45.816 -34.728,-46.066 -31.478,-46.066 -31.228,-46.316 -31.228,-46.816 -30.978,-47.066 -27.478,-47.066 -27.228,-46.816 -27.228,-43.816
  region net V_BAT: -34.728,-48.816 -27.478,-48.816 -27.228,-49.066 -27.228,-54.566 -27.478,-54.816 -29.978,-54.816 -30.228,-55.066 -30.228,-61.566 -30.478,-61.816 -34.978,-61.816 -35.228,-61.566 -35.228,-54.816 -34.978,-54.566 -31.978,-54.566 -31.978,-51.316 -32.228,-51.066 -34.728,-51.066 -34.978,-50.816 -34.978,-49.066
Multi-Layer:
  pour cut-out: -29.228,-62.066 -23.978,-62.066 -23.728,-61.816 -23.728,-50.066 -23.978,-49.816 -26.978,-49.816 -26.978,-49.566 -23.978,-49.566 -23.478,-50.066 -23.478,-61.816 -23.978,-62.316 -29.228,-62.316
  pour cut-out: -32.228,-51.316 -32.228,-54.066 -32.478,-54.316 -35.228,-54.316 -35.478,-54.566 -35.478,-62.066 -35.228,-62.316 -30.478,-62.316 -30.478,-61.816 -35.228,-61.816 -35.228,-54.816 -34.978,-54.566 -32.228,-54.566 -31.978,-54.316 -31.978,-51.566
  pour cut-out: -27.228,-49.066 -27.478,-48.816 -34.728,-48.816 -34.978,-49.066 -34.978,-50.816 -34.728,-51.066 -32.228,-51.066 -31.978,-51.316 -31.978,-51.566 -32.228,-51.316 -34.978,-51.316 -35.228,-51.066 -35.228,-49.066 -34.728,-48.566 -27.228,-48.566
  pour cut-out: -29.228,-62.066 -29.478,-62.066 -29.728,-61.816 -29.728,-55.566 -29.478,-55.316 -27.228,-55.316 -26.978,-55.066 -26.978,-48.566 -27.228,-48.566 -27.228,-54.816 -29.978,-54.816 -30.228,-55.066 -30.228,-61.566 -30.478,-61.816 -30.478,-62.316 -29.228,-62.316

## Silkscreen, mask and mechanical layers (free items; w line width, h text height)
Top Overlay:
  lines w0.254: -35.781,-70.968 -35.781,-63.221 ; -35.781,-63.189 -35.781,2.089 ; -35.781,2.108 -35.781,2.565 ; -2.494,-70.942 -2.494,-63.271 ; -2.494,-63.297 -2.494,2.489
  text "INDEX" at -11.253,0.534 h1
  text "A12" at -30.028,-1.216 h1
  text "B07" at -27.428,-1.216 h1
  text "F01" at -24.803,-1.216 h1
  text "F04" at -22.303,-1.216 h1
  text "B05" at -19.828,-1.216 h1
  text "B03" at -17.278,-1.216 h1
  text "A09" at -33.784,-3.666 h1
  text "RING" at -34.341,-4.641 h1
  text "GND" at -12.453,-5.716 h1 r270
  text "A12" at -33.777,-6.216 h1
  text "UART1" at -34.928,-7.091 h1
  text "RX" at -33.397,-7.891 h1
  text "MIDDLE" at -11.653,-9.863 h1
  text "A12" at -33.777,-14.241 h1
  text "GND" at -12.453,-16.266 h1 r270
  text "TH_JO" at -35.003,-16.316 h1
  text "A07" at -18.523,-16.891 h1
  text "B00" at -33.715,-17.241 h1
  text "B07" at -33.717,-19.291 h1
  text "A06" at -18.523,-19.341 h1
  text "RING" at -11.028,-20.192 h1
  text "B06" at -33.717,-21.141 h1
  text "A05" at -18.528,-21.841 h1
  text "UART1" at -34.928,-21.891 h1
  text "TX" at -33.347,-22.691 h1
  text "A04" at -18.52,-24.016 h1
  text "B01" at -33.593,-24.366 h1
  text "LITTLE" at -19.791,-24.891 h1
  text "GND" at -12.453,-26.516 h1 r270
  text "A03" at -18.523,-26.941 h1
  text "A01" at -18.399,-29.216 h1
  text "F01" at -33.536,-29.491 h1
  text "MIDDLE" at -20.235,-30.116 h1
  text "LITTLE" at -11.378,-30.528 h1
  text "A00" at -18.521,-31.566 h1
  text "INDEX" at -19.614,-32.516 h1
  text "A11" at -33.659,-34.016 h1
  text "THUMB" at -35.342,-34.991 h1
  text "B05" at -33.721,-36.891 h1
  text "GND" at -12.453,-37.016 h1 r270
  text "BEAD" at -18.748,-38.557 h1 r90
  text "B03" at -18.457,-39.691 h1
  text "B04" at -33.714,-39.841 h1
  text "THUMB" at -11.528,-40.881 h1
  text "S10V4F5" at -34.978,-42.816 h1
  text "VCC" at -31.519,-43.866 h1 r270
  text "GND" at -31.519,-46.441 h1 r270
  text "GND" at -12.453,-47.241 h1 r270
  text "VBAT" at -31.53,-48.866 h1 r270
  text "TH_JO" at -11.303,-51.366 h1
  text "RX" at -22.503,-51.397 h1 r270
  text "TX" at -22.503,-54.072 h1 r270
  text "GND" at -10.853,-60.841 h1
  text "ADC1-4" at -19.803,-62.416 h1
  text "ADC2-2" at -13.253,-62.416 h1
  text "ADC2-4" at -6.728,-62.416 h1
  text "ADC1-12" at -35.503,-62.666 h1 r270
  text "ADC2-3" at -29.053,-62.666 h1 r270
  text "FSR-03" at -16.403,-67.141 h1 r270
  text "FSR-02" at -9.953,-67.147 h1 r270
  text "FSR-01" at -3.428,-67.264 h1 r270
Bottom Overlay:
  drawing of 1596 lines, arcs and shapes, not listed
  text "2019.11.12" at -35.771,-2.333 h1.52 r90
  text "HRI Hand Controller" at -33.271,-2.333 h1.52 r90
  text "Designed by" at -19.003,-9.15 h0.7
  text "H.J.Park" at -19.059,-10.936 h0.7
Mechanical 1:
  lines w0.254: -27.228,-50.316 -27.228,-49.066 -27.478,-48.816 -34.728,-48.816 -34.853,-48.941 ; -27.228,-50.066 -27.228,-54.566 -27.478,-54.816 -29.978,-54.816 -30.228,-55.066 -30.228,-61.566 -30.478,-61.816 -34.978,-61.816 -35.228,-61.566 -35.228,-54.816 -34.978,-54.566 -31.978,-54.566 -31.978,-51.316 -32.228,-51.066 -32.478,-51.066 -34.728,-51.066 -34.978,-50.816 -34.978,-49.316 ; -34.978,-49.316 -34.978,-49.316 ; -34.978,-49.316 -34.978,-49.066 -34.853,-48.941 ; -34.853,-48.941 -34.853,-48.941 ; -34.978,-45.816 -34.728,-46.066 -31.478,-46.066 -31.228,-46.316 -31.228,-46.816 -30.978,-47.066 -27.478,-47.066 -27.228,-46.816 -27.228,-44.316 -27.228,-43.816 -27.478,-43.566 -34.728,-43.566 -34.978,-43.816 -34.978,-45.816 ; -29.728,-61.816 -29.478,-62.066 -23.978,-62.066 -23.728,-61.816 -23.728,-50.066 -23.978,-49.816 -26.728,-49.816 -26.978,-50.066 -26.978,-55.066 -27.228,-55.316 -29.478,-55.316 -29.728,-55.566 -29.728,-61.566 -29.728,-61.816
Mechanical 2:
  lines w0.254: -37.771,-68.833 -37.771,0.167 ; -37.77,-68.834 ccw(c-35.789,-68.529) -35.737,-70.533 ; -37.77,0.127 cw(c-35.751,0.14) -35.763,2.159 ; -35.771,2.167 -2.271,2.167 ; -35.729,-70.525 -2.729,-70.525 ; -2.743,-70.536 ccw(c-2.667,-68.377) -0.508,-68.453 ; -2.337,2.159 cw(c-2.502,0.165) -0.508,0 ; -0.5,-68.5 -0.5,0